# Altium PCB PAPAYA_PCB.PcbDoc
Units mil, origin at the board's own origin, x right, y up, seen from the top; angles counter-clockwise.
Board outline 2505.34 x 3520 mil, 2 copper layers (Top Layer, GND); 40 components, 32 nets, 125 pads, 16 vias.
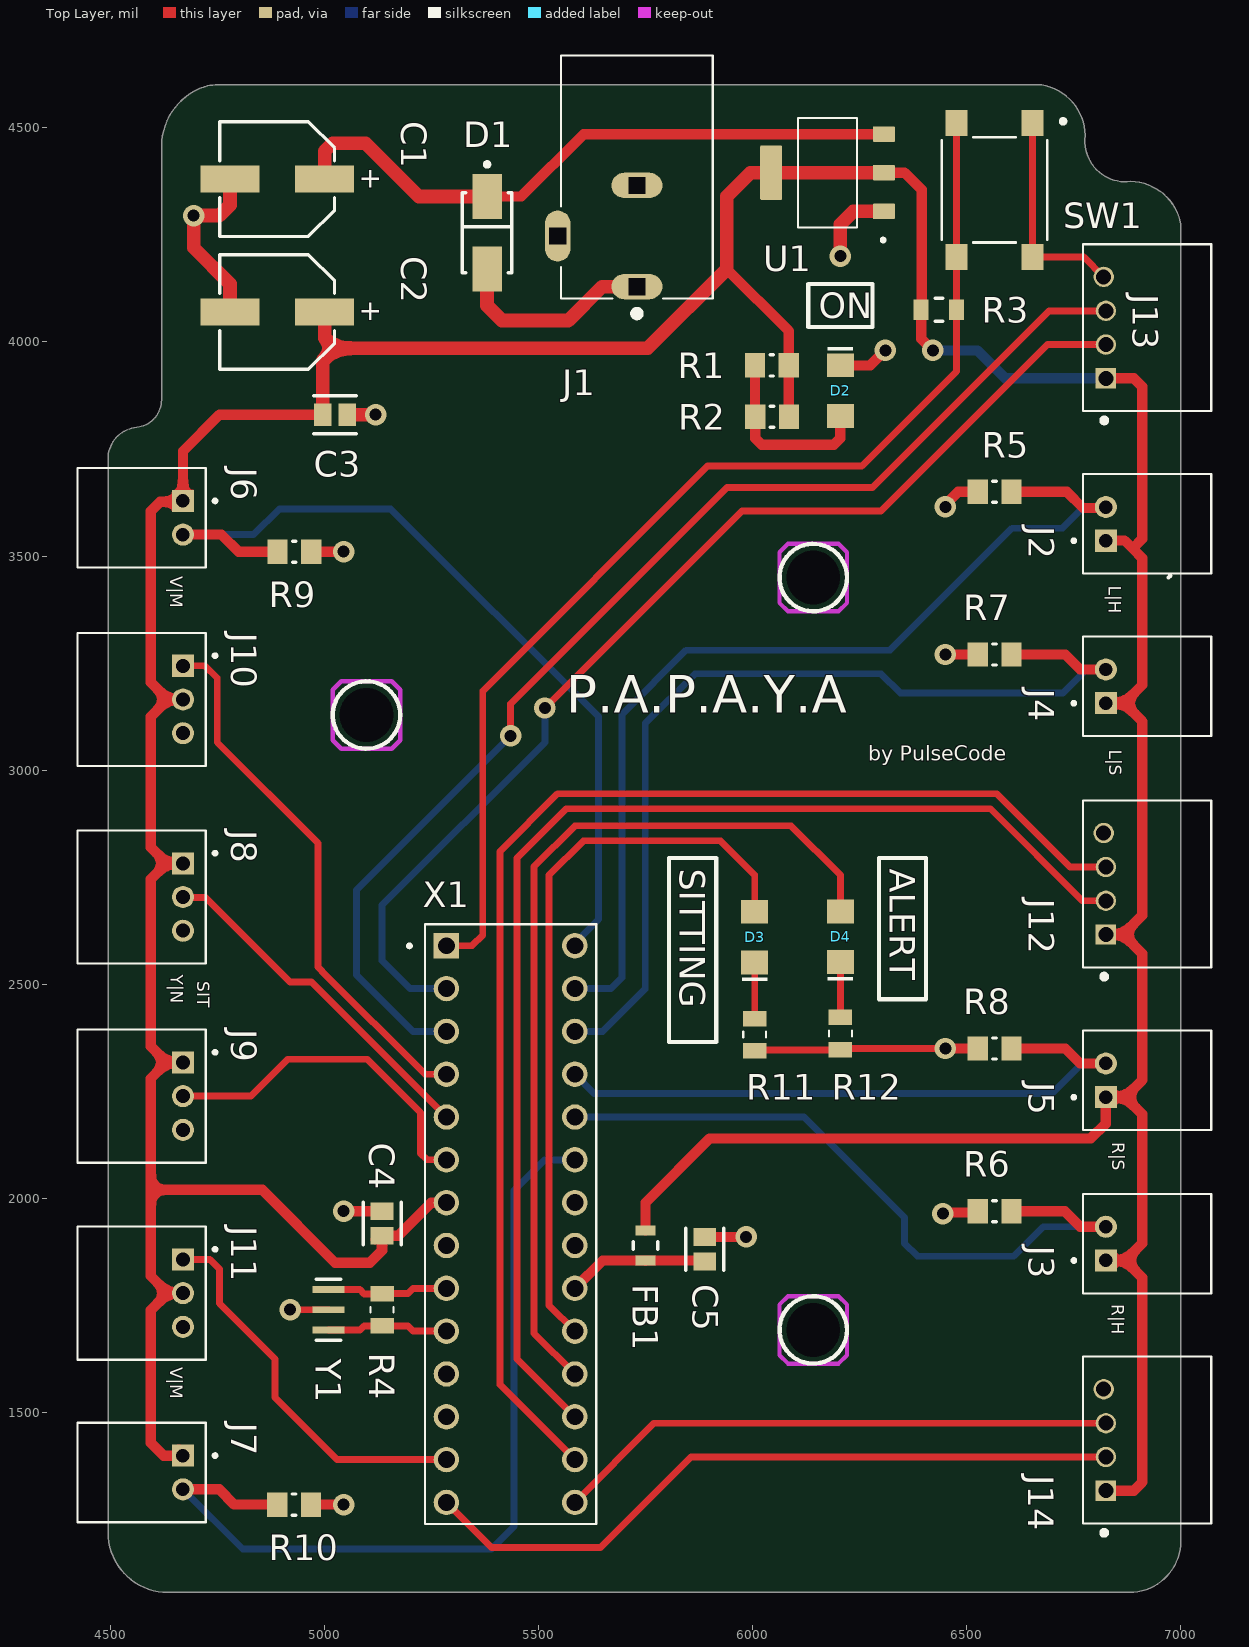
[diagram p0: Top Layer view]
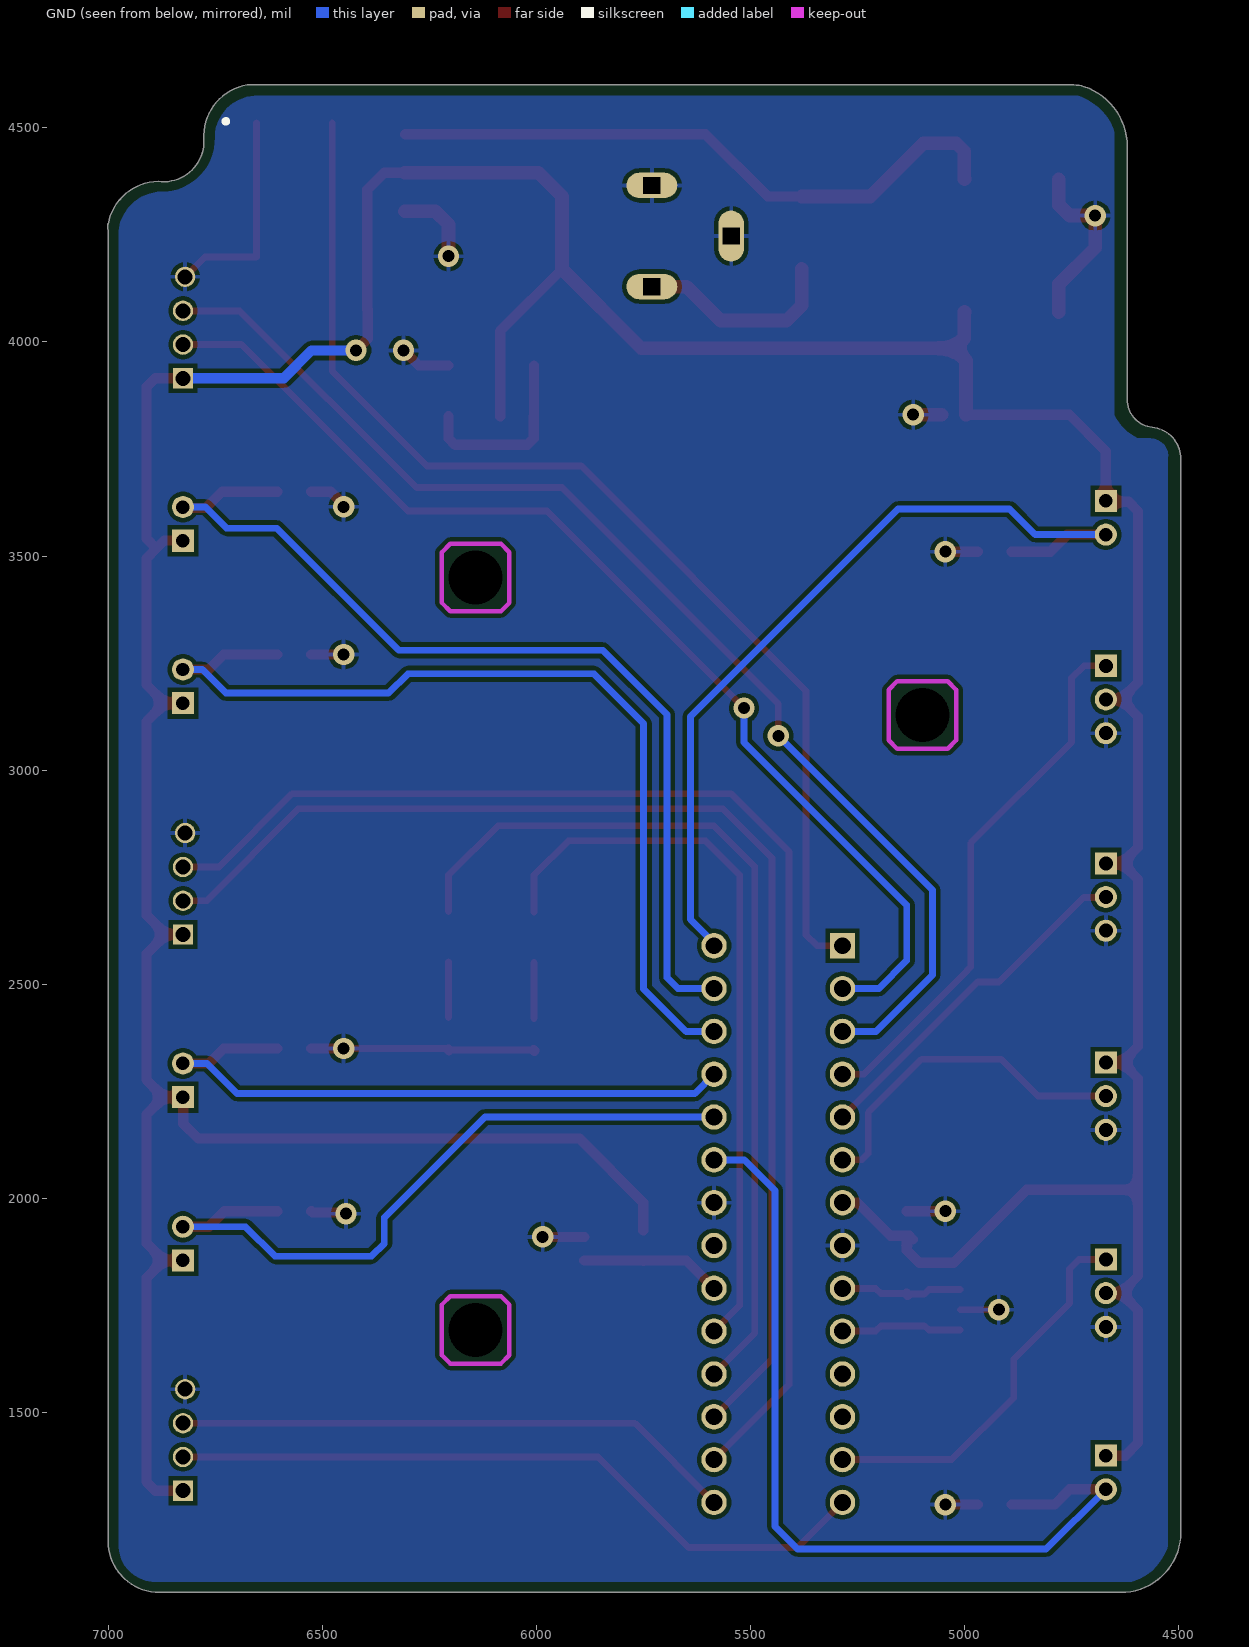
[diagram p1: GND view, seen from below]
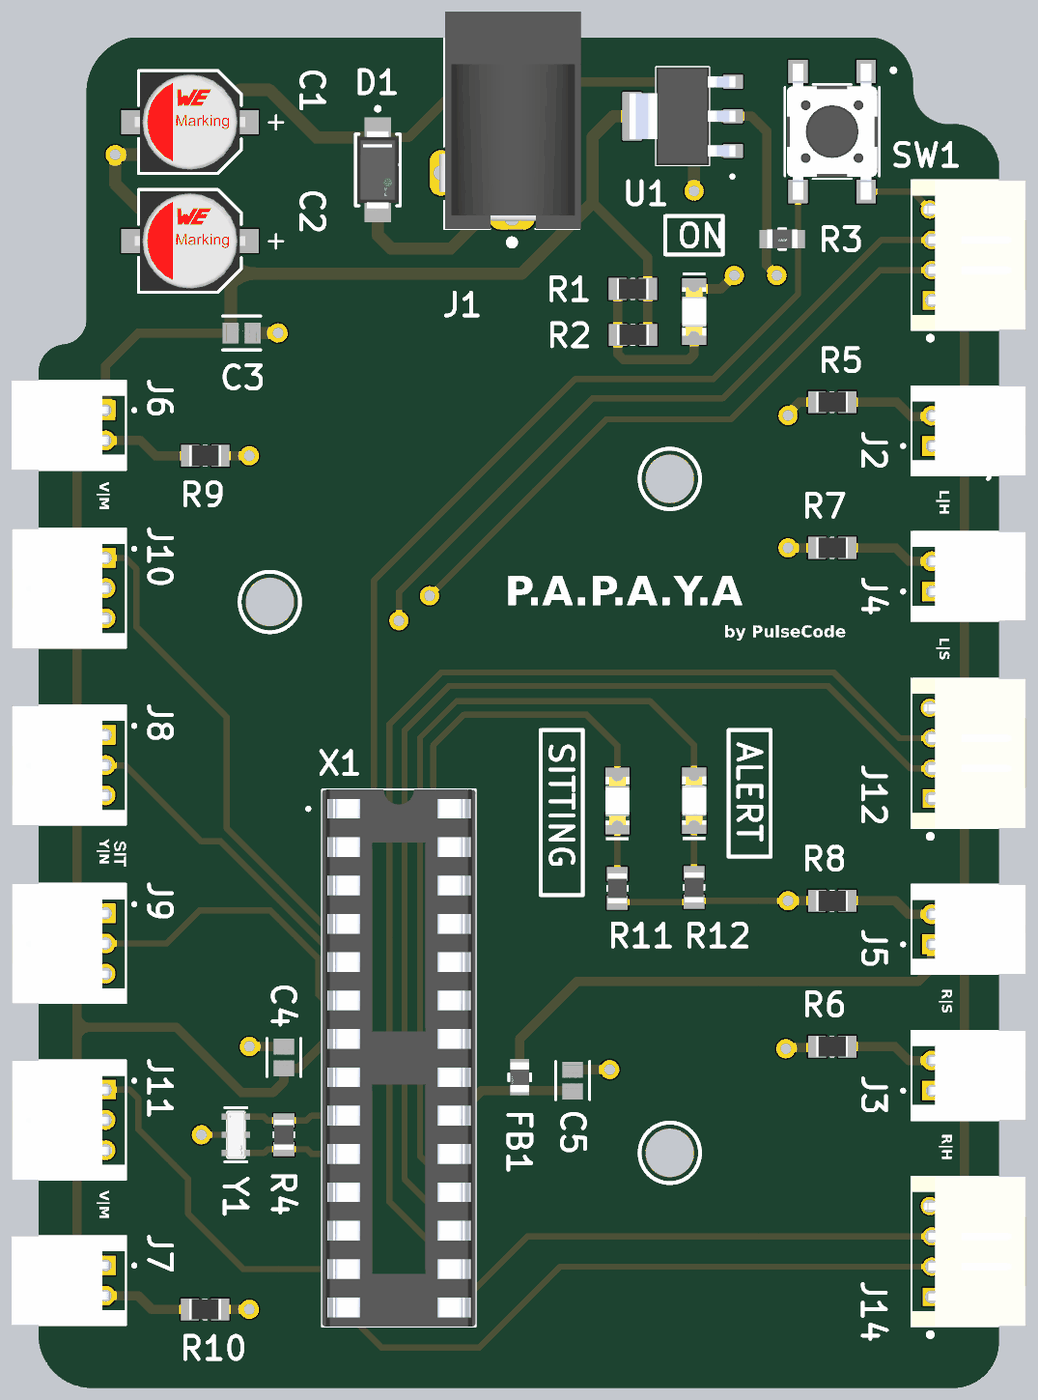
[diagram p2: 3D render of the assembled board from above, using the file's embedded part models]

## Layer stack, top to bottom
Top Solder: solder mask 0.4, Solder Resist, Dk 3.5
Top Layer: signal copper 1.4
Dielectric 1: dielectric 12.6, FR-4, Dk 4.8
GND: signal copper 1.4
Bottom Solder: solder mask 0.4, Solder Resist, Dk 3.5

## Board outline
4635,1080 6880,1080 ccw(c6880,1200) 7000,1200 7000,4225 cw(c10644.97,4225.01) 7000.34,4274.99 ccw(c7000.29,4275) 7000.28,4275.06 ccw(c7000.16,4274.71) 7000,4275.05 ccw(c6880.4,4253.19) 6883.11,4374.74 cw(c6870.42,4468.26) 6776.12,4472.34 ccw(c6655.64,4480.79) 6675.05,4600 4744.97,4600 ccw(c4744.93,4524.22) 4721.12,4596.16 ccw(c4767.25,4456.33) 4620,4456.31 4620,3915 4619.99,3865.15 cw(c4554.94,3865.13) 4561.73,3800.43 ccw(c4568.53,3727.21) 4495,3726.31 4495,1220 ccw(c4635,1220)

## Design rules (kind name [scope] priority, off if disabled: settings)
Clearance [All] p1: gap=10 ignorepadtopadclearanceinfootprint=FALSE except(0: Arc-Hole Track-Hole SMDPad-Hole THPad-Hole Via-Hole Fill-Hole Poly-Hole Region-Hole Text-Hole)
HoleSize [All] p1: absolutevalues=TRUE maxlimit=137.8 minlimit=1 maxpercent=80.000 minpercent=20.000
PolygonConnect [All] p1: connectstyle=Relief reliefconductorwidth=10 reliefentries=4 polygonreliefangle="90 Angle" airgapwidth=10
RoutingVias [All] p1: holewidth=28 width=50 viastyle="Through Hole" minholewidth=28 minwidth=50 maxholewidth=28 maxwidth=50
SilkToSilkClearance [All] p1: silktosilkclearance=5.91
SilkToSolderMaskClearance [IsPad] p1: minsilkscreentomaskgap=5.91 clearancetoexposedcopper=TRUE
SolderMaskExpansion [All] p1: expansion=4 istentingtop=FALSE
Width [All] p1: maxlimit=40 minlimit=10 preferedwidth=10 minimp=50.000000 maximp=50.000000 favimp=50.000000
27 further rules are at their usual default settings.

## Components (designator, comment, footprint, x,y, rotation, side; value= is the part's Value field where it differs from the comment)
C1 "865080443007" WCAP-ASLI_D6.3H5.5 4890,4380 r0 top
C2 "865080443007" WCAP-ASLI_D6.3H5.5 4890,4070 r0 top
C3 "CL21B104KBCNNNC" FP-CL21-IPC_C 5025,3830 r0 top
C4 "CL21B104KBCNNNC" FP-CL21-IPC_C 5135,1941.43 r90 top
C5 "CL21B104KBCNNNC" FP-CL21-IPC_C 5888.33,1881.43 r90 top
D1 "SS14" FP-403AE-MFG 5380,4255 r90 top
D2 "150120GS75000" WL-SMCW_1206_150120xx75000 6205,3885.94 r270 top
D3 "150120GS75000" WL-SMCW_1206_150120xx75000 6005,2610 r90 top
D4 "150120RS75000" WL-SMCW_1206_150120xx75000 6205,2610.94 r90 top
FB1 "BLM21PG300SN1D" FP-BLM21-0_2-t0_85-e0_5-d-MFG 5750.19,1890 r270 top
J1 "PJ-102AH" CUI_PJ-102AH 5730,4385 r90 top
J2 "S2B-PH-K-S(LF)(SN)" JST_S2B-PH-K-S(LF)(SN) 6825,3575 r90 top
J3 "S2B-PH-K-S(LF)(SN)" JST_S2B-PH-K-S(LF)(SN) 6825,1894.37 r90 top
J4 "S2B-PH-K-S(LF)(SN)" JST_S2B-PH-K-S(LF)(SN) 6825,3195.63 r90 top
J5 "S2B-PH-K-S(LF)(SN)" JST_S2B-PH-K-S(LF)(SN) 6825,2275.63 r90 top
J6 "S2B-PH-K-S(LF)(SN)" JST_S2B-PH-K-S(LF)(SN) 4670,3589.37 r270 top
J7 "S2B-PH-K-S(LF)(SN)" JST_S2B-PH-K-S(LF)(SN) 4670,1360 r270 top
J8 "S3B-PH-K-S(LF)(SN)" JST_S3B-PH-K-S(LF)(SN) 4670,2782.48 r270 top
J9 "S3B-PH-K-S(LF)(SN)" JST_S3B-PH-K-S(LF)(SN) 4670,2317.48 r270 top
J10 "S3B-PH-K-S(LF)(SN)" JST_S3B-PH-K-S(LF)(SN) 4670,3243.74 r270 top
J11 "S3B-PH-K-S(LF)(SN)" JST_S3B-PH-K-S(LF)(SN) 4670,1857.48 r270 top
J12 "S4B-PH-K-S(LF)(SN)" JST_S4B-PH-K-S(LF)(SN) 6825,2734.37 r90 top
J13 "S4B-PH-K-S(LF)(SN)" JST_S4B-PH-K-S(LF)(SN) 6825,4033.11 r90 top
J14 "S4B-PH-K-S(LF)(SN)" JST_S4B-PH-K-S(LF)(SN) 6825,1435.63 r90 top
R1 "RC0805FR-071KL" RESC2013X60X35ML10T20 6045,3945 r0 top
R2 "RC0805FR-071KL" RESC2013X60X35ML10T20 6045.63,3825 r0 top
R3 "RC0805JR-071KL" FP-RC0805-0_6-MFG 6435,4075 r180 top
R4 "RC0805FR-071ML" RESC2012X60N 5135,1740 r90 top value=1M
R5 "RC0805JR-0710KL" RESC2013X60X35ML10T20 6565,3650 r0 top
R6 "RC0805JR-0710KL" RESC2013X60X35ML10T20 6565,1970 r0 top
R7 "RC0805JR-0710KL" RESC2013X60X35ML10T20 6565,3270 r0 top
R8 "RC0805JR-0710KL" RESC2013X60X35ML10T20 6565,2350 r0 top
R9 "RC0805JR-0710KL" RESC2013X60X35ML10T20 4930,3510 r180 top
R10 "RC0805JR-0710KL" RESC2013X60X35ML10T20 4929.37,1285 r180 top
R11 "RC0805JR-07330RL" RESC2012X60N 6005,2382.4 r90 top value="330 Ohm"
R12 "RC0805JR-07330RL" RESC2012X60N 6205,2385 r90 top value="330 Ohm"
SW1 "PTS645SM43SMTR92LFS" SWITCH_43SMTR92LFS 6565,4355 r270 top
U1 "AMS1117-5.0_1" SOT229P700X180-4N 6175,4395 r90 top
X1 "ED281DT" OST_ED281DT 5435,1940 r0 top
Y1 "CSTNE16M0V530000R0" FP-CSTNE16M0V530000R0-MFG 5010,1740 r90 top

## Footprints (in the part's own frame and the unit in brackets; to place one, negate y for a bottom-side part, rotate by r counter-clockwise, add the part's x,y. Pads: shape width x height; smd on the part's side, far side on the other; paste and mask are expansions set on the pad)
CUI_PJ-102AH [mm]
  oval 1.508x3.016 hole 1 square: 1(-6.5,0) 2(-0.5,0)
  oval 3.016x1.508 hole 1 square: 3(-3.5,4.7)
  silkscreen extent -8.3,-4.5 7.2,4.5, body extent -7.2,-4.57 7.2,4.83, height 11.26
FP-403AE-MFG [mm]
  rect 2.65x1.75 smd paste+0 mask+0: 1(-2.15,0) 2(2.15,0)
  silkscreen extent -2.37,-1.48 4.17,1.48, body extent -3.57,-1.58 3.57,1.58, height 0.25
FP-BLM21-0_2-t0_85-e0_5-d-MFG [mm]
  rect 0.6x1.2 smd paste-1000 mask-1000: 1(-0.9,0) 2(0.9,0)
  silkscreen extent -0.23,-0.72 0.23,0.72, body extent -1.3,-0.82 1.3,0.82, height 0.25
FP-CL21-IPC_C [mil]
  rect 41.52x53.39 smd paste+0 mask+0: 1(-28.57,0) 2(28.57,0)
  silkscreen extent -49,-44 49,44, body extent -53,-32 53,32, height 10
FP-CSTNE16M0V530000R0-MFG [mm]
  rect 0.4x1.9 smd paste+0 mask+0: 1(1.2,0) 2(0,0) 3(-1.2,0)
  silkscreen extent -1.8,-0.72 1.8,0.72, body extent -1.78,-1.05 1.78,1.05, height 0.25
FP-RC0805-0_6-MFG [mm]
  rect 0.9x1.2 smd paste+0 mask+0: 1(-1.05,0) 2(1.05,0)
  silkscreen extent -0.23,-0.67 0.23,0.67, body extent -1.6,-0.77 1.6,0.77, height 0.25
JST_S2B-PH-K-S(LF)(SN) [mm]
  rect 1.308x1.308 / inner round 1.308 / far side rect 1.308x1.308 hole 0.8: 1(-1,0)
  round 1.308 hole 0.8: 2(1,0)
  silkscreen extent -2.95,-6.25 2.95,2, body extent -2.95,-6.22 2.95,1.38, height 4.8
JST_S3B-PH-K-S(LF)(SN) [mm]
  rect 1.308x1.308 hole 0.83: 1(0,0)
  round 1.308 hole 0.83: 2(2,0) 3(4,0)
  silkscreen extent -1.95,-6.25 5.95,2, body extent -1.92,-6.2 5.98,1.4, height 4.8
JST_S4B-PH-K-S(LF)(SN) [mm]
  rect 1.208x1.208 hole 0.89: 1(-3,0)
  round 1.208 hole 0.89: 2(-1,0) 3(1,0) 4(3.016,0.127)
  silkscreen extent -5.64,-6.25 4.95,1.35, body extent -4.95,-6.22 4.95,1.38, height 4.8
OST_ED281DT [mm]
  rect 1.508x1.508 / inner round 1.508 / far side rect 1.508x1.508 hole 1: 1(-3.81,16.51)
  round 1.508 hole 1: 2(-3.81,13.97) 3(-3.81,11.43) 4(-3.81,8.89) 5(-3.81,6.35) 6(-3.81,3.81) 7(-3.81,1.27) 8(-3.81,-1.27) 9(-3.81,-3.81) 10(-3.81,-6.35) 11(-3.81,-8.89) 12(-3.81,-11.43) 13(-3.81,-13.97) 14(-3.81,-16.51) 15(3.81,-16.51) 16(3.81,-13.97) 17(3.81,-11.43) 18(3.81,-8.89) 19(3.81,-6.35) 20(3.81,-3.81) 21(3.81,-1.27) 22(3.81,1.27) 23(3.81,3.81) 24(3.81,6.35) 25(3.81,8.89) 26(3.81,11.43) 27(3.81,13.97) 28(3.81,16.51)
  silkscreen extent -6.1,-17.78 5.08,17.78, body extent -5.08,-17.78 5.08,17.78, height 5.27
RESC2012X60N [mm]
  rect 0.92x1.38 smd: 1(-0.955,0) 2(0.955,0)
  silkscreen extent -0.17,-0.68 0.17,0.68, body extent -1,-0.63 1,0.63, height 0.6
RESC2013X60X35ML10T20 [mm] "Chip Resistor, 2-Leads, Body 2.1x1.35mm, IPC Low Density"
  rect 1.2x1.45 smd: 1(-1,0) 2(1,0)
  silkscreen extent -0.1,-0.63 0.1,0.63, body extent -1.05,-0.68 1.05,0.67, height 0.6
SOT229P700X180-4N [mm]
  rrect15% 0.93x1.31 smd: 1(-2.29,-3.345) 2(0,-3.345) 3(2.29,-3.345)
  rrect15% 3.24x1.31 smd: 4(0,3.345)
  silkscreen extent -4.09,-3.4 3.25,1.75, body extent -3.25,-3.5 3.25,3.5, height 1.8
SWITCH_43SMTR92LFS [mil]
  rect 61x51 smd: 1(-156.5,88.58) 2(156.5,88.58) 3(-156.5,-88.58) 4(156.5,-88.58)
  silkscreen extent -165,-123 123,165, body extent -177,-118 177,118, height 169
WCAP-ASLI_D6.3H5.5 [mm] "Aluminium Electrolytic V-Chip SMT Capacitors, 6.3x5.5mm"
  rect 3.5x1.6 smd: 1(2.8,0) 2(-2.8,0)
  silkscreen extent -3.4,-3.4 3.4,3.4, body extent -3.65,-3.3 3.65,3.3, height 5.5
WL-SMCW_1206_150120xx75000 [mm] "SMD Mono-color Chip LED, body 3.2x1.6mm"
  rect 1.4x1.6 smd: 1(-1.5,0) 2(1.5,0)
  silkscreen extent -2.6,-0.75 -2.4,0.75, body extent -1.6,-0.8 1.6,0.8, height 0.68

## Part data
C1 C2: library part CMP-03913-53914590-1, "865080443007 WCAP-ASLI Aluminum Electrolytic Capacitors", Capacitance=47µF, Case/Package=Radial, ESR (Equivalent Series Resistance)=397.678mΩ, Insulation Resistance=2.12766MΩ, Leakage Current=11.75µA, Max Operating Temperature=105°C, Min Operating Temperature=-55°C, Ripple Current=220mA, Tolerance=20%, Voltage Rating=25V, Diameter=6.3mm, Height=5.5mm, Height - Seated (Max)=5.5118mm, Impedance=560mΩ, Length=5.5mm, Life (Hours)=2000hours, Mount="Surface Mount", NexarPartId=53914590, Packaging="Cut Tape (CT)", Polarity=Polar, REACH SVHC=Unknown, Ripple Current (AC)=220mA, RoHS=Compliant, Voltage Rating (DC)=25V, Width=6.6mm
C3 C4 C5: library part CMP-2000-05017-2, "CL21 Series 0805 100nF 50V ±10% Tolerance X7R Multilayer Ceramic Chip Capacitor", Capacitance=100nF, Case Code (Imperial)=0805, Case Code (Metric)=2012, Dielectric=X7R, Max Operating Temperature=125°C, Min Operating Temperature=-55°C, Tolerance=10%, Voltage=50V, Case/Package=0805, Contact Plating=Tin, Depth=1.25mm, Height=0.85mm, Lead Free="Lead Free", Length=2mm, Material=Ceramic, Mount="Surface Mount", Packaging="Tape and Reel", Radiation Hardening=No, Thickness=0.037inch, Voltage Rating=50V, Voltage Rating (DC)=50V, Width=0.049inch
D1: library part CMP-2000-04943-2, "DIODE SCHOTTKY 40V 1A SMA", Forward Current=1A, Manufacturer="ON Semiconductor", Max Junction Temp=+125°C, Max Repetitive Reverse Voltage=40V, Max Surge Forward Current=40A, Package=403AE, Peak Reverse Current=0.2mA, Temperature="-65°C to +125°C", Temperature Range Low=-65°C, Automotive=No, Category=Diode, ComponentLink2Description=Datasheet, ComponentLink2URL=https://www.onsemi.com/pub/Collateral/SS19-D.PDF, Device Class L1="Discrete Semiconductors", Device Class L2=Diodes, Device Class L3="Schottky Diodes", Digikey Description="DIODE SCHOTTKY 40V 1A SMA", Height=2.5mm, Lead Free=Yes, Manufacturer Part Number=SS14, Mouser Description="Schottky Diodes & Rectifiers SMA 40V 1.0A", Octopart=https://octopart.com/ss14-on+semiconductor-29205033, RoHS=TRUE, Standoff Height=0.05mm, Temperature Range High=+125°C
D2 D3: library part CMP-1426-00007-3, "WURTH ELEKTRONIK - 150080GS75000 - LED, Green, SMD, 0805, 30 mA, 3.2 V, 520 nm", Case Code (Imperial)=0805, Case Code (Metric)=2012, Color=Green, Forward Current=100mA, Forward Voltage=3.2V, Max Junction Temperature (Tj)=95°C, Max Operating Temperature=85°C, Max Reverse Voltage (DC)=5V, Min Operating Temperature=-40°C, Power Dissipation=105mW, Test Current=20mA, Case/Package=0805, Dominant Wavelength=525nm, Height=700µm, Length=2mm, Lens Style="Clear, Rectangular", Luminous Intensity=450mcd, Mount="Surface Mount", Packaging="Tape and Reel", Peak Wavelength=515nm, REACH SVHC=Unknown, Reverse Voltage=5V, RoHS=Compliant, Viewing Angle=140°, Wavelength=525nm, Width=1.25mm
D4: library part CMP-1426-00011-3, "LED Uni-Color Red 630nm 2-Pin Chip 0805(2012Metric) T/R", Case Code (Imperial)=0805, Case Code (Metric)=2012, Color=Red, Forward Current=100mA, Forward Voltage=2V, Max Junction Temperature (Tj)=95°C, Max Operating Temperature=85°C, Max Reverse Voltage (DC)=5V, Min Operating Temperature=-40°C, Power Dissipation=72mW, Test Current=20mA, Case/Package=0805, Dominant Wavelength=625nm, Height=700µm, Length=2mm, Lens Style="Clear, Rectangular", Luminous Intensity=150mcd, Mount="Surface Mount", Packaging="Tape and Reel", Peak Wavelength=630nm, REACH SVHC=Unknown, RoHS=Compliant, Viewing Angle=140°, Wavelength=625nm, Width=1.25mm
FB1: library part CMP-0686-00620-3, "Chip Ferrite Bead, 0805, 30Ω @ 100MHz, 0.014Ω, , 4A", Case Code (Imperial)=0805, Case Code (Metric)=2012, Current Rating=4A, DC Current=3A, DC Resistance (DCR)=14mR, Frequency=100MHz, Max Operating Temperature=125°C, Min Operating Temperature=-55°C, Package Quantity=1, Resistance=15mR, Tolerance=25%, Case/Package=0805, Core Material=Ferrite, DC Resistance-Max=14mR, Depth=1.25mm, Height=0.85mm, Impedance=30R, Lead Free="Lead Free", Length=2mm, Material=Steel, Max Current Rating=4A, Max DC Current=3A, Military Standard=Not, Number of Circuits=1, Number of Lines=1, Number of Pins=2, Packaging="Tape and Reel", Radiation Hardening=No, REACH SVHC="No SVHC", RoHS Compliant=Yes, Series=BLM21P, Shielding=Unshielded, Termination=SMD/SMT, Test Frequency=100MHz, Width=1.25mm
J1: "2.0 x 6.5 mm, 5.0 A, Horizontal, Through Hole, Tapered Pins, Dc Power Jack Connector", Manufacturer="Same Sky", Package=None, Supplier Part Number=CP-102AH-ND, Check_prices=https://www.snapeda.com/parts/PJ-102AH/Same+Sky/view-part/?ref=eda, ComponentLink1Description=https://datasheet.octopart.com/PJ-102AH-Same-Sky-datasheet-182049965.pdf?src-supplier=Future+Electronics, ComponentLink1URL=https://datasheet.octopart.com/PJ-102AH-Same-Sky-datasheet-182049965.pdf?src-supplier=Future+Electronics, ComponentLink2Description=http://www.cui.com/Product/Resource/FuturePDF/PJ-102AH.pdf?src-supplier=Future+Electronics, ComponentLink2URL=http://www.cui.com/Product/Resource/FuturePDF/PJ-102AH.pdf?src-supplier=Future+Electronics, ComponentLink3Description=https://datasheet.octopart.com/PJ-102AH-Same-Sky-datasheet-182881008.pdf?src-supplier=Electro+Sonic, ComponentLink3URL=https://datasheet.octopart.com/PJ-102AH-Same-Sky-datasheet-182881008.pdf?src-supplier=Electro+Sonic, ComponentLink4Description=https://datasheet.octopart.com/PJ-102AH-CUI-Devices-datasheet-175925642.pdf?src-supplier=Master+Electronics, ComponentLink4URL=https://datasheet.octopart.com/PJ-102AH-CUI-Devices-datasheet-175925642.pdf?src-supplier=Master+Electronics, Manufacturer Part Number=PJ-102AH, MF="Same Sky", MP=PJ-102AH, Pricing="1=0.76, 10=0.646, 25=0.6056, 50=0.5766, 200=0.5227, 400=0.4977, 600=0.48367, 1000=0.46653, 2600=0.43611 (USD)", RoHS=No, SnapEDA_Link=https://www.snapeda.com/parts/PJ-102AH/Same+Sky/view-part/?ref=snap, Stock=37690, Supplier=Digikey
J2 J3 J4 J5 J6 J7: "Connector Header Through Hole, Right Angle 2 position", Package=None, Availability="In Stock", Check_prices=https://www.snapeda.com/parts/S2B-PH-K-S(LF)(SN)/JST+Sales+America+Inc./view-part/?ref=eda, MF="JST Sales America Inc.", MP=S2B-PH-K-S(LF)(SN), Price=None, Purchase-URL=https://pricing.snapeda.com/search/part/S2B-PH-K-S(LF)(SN)/?ref=eda, SnapEDA_Link=https://www.snapeda.com/parts/S2B-PH-K-S(LF)(SN)/JST+Sales+America+Inc./view-part/?ref=snap
J8 J9 J10 J11: "Connector Header Through Hole, Right Angle 3 position 0.079\" (2.00mm)", Package=None, Availability=Unavailable, MP=S3B-PH-K-S(LF)(SN), Price=None
J12 J13 J14: "Connector Header Through Hole, Right Angle 4 position 0.079 _2.00mm_", Package=None, Availability=Unavailable, MF="JST Sales", MP=S4B-PH-K-S_LF__SN_, Price=None, SnapEDA_Link=https://www.snapeda.com/parts/S4B-PH-K-S%28LF%29%28SN%29/JST%20Sales%20America%20Inc./view-part/591324/?ref=snap
R1 R2: library part CMP-2100-03671-1, "Chip Resistor, 1 KOhm, +/- 1%, 125 mW, -55 to 155 degC, 0805 (2012 Metric), RoHS, Tape and Reel", Case Code (Imperial)=0805, Case Code (Metric)=2012, Manufacturer=Yageo, Max Operating Temperature=155degC, Max Power Dissipation=125mW, Min Operating Temperature=-55degC, Package Description="2-Pin Surface Mounted Device, Body 2 x 1.25 mm", Package Quantity=1, Resistance=1KOhm, Temperature Coefficient=100ppm/degreesC, Tolerance=1%, Voltage Rating=150V, Case/Package=0805, Composition=ThickFilm, Datasheet URL=http://www.yageo.com/NewPortal/yageodocoutput?fileName=/pdf/R-Chip/PYu-RC_Group_51_RoHS_L_5.pdf, Datasheet Version="Rev. 5, 10/2016", Depth=1.25mm, Height=0.024inch, Lead Free=LeadFree, Length=0.079inch, Manufacturer URL=http://www.yageo.com/, Military Standard=Not, Number of Pins=2, Number of Terminations=2, Package Reference=0805, Packaging=TapeandReel, Power Rating=125mW, REACH SVHC=Unknown, RoHSCompliant=true, Termination=SMD/SMT, Voltage Rating (DC)=150V, Width=0.049inch
R3: library part CMP-03412-037820-1, "RES SMD 1K OHM 5% 1/8W 0805", Case Code (Imperial)=0805, Case Code (Metric)=2012, Max Operating Temperature=155°C, Max Power Dissipation=125mW, Min Operating Temperature=-55°C, Resistance=1kR, Resistance Tolerance=5%, Resistor Type="Thick Film", Temperature Coefficient=100ppm/°C, Voltage Rating=150V, Case/Package=0805, Construction=Rectangular, Contact Plating=Tin, Depth=1.25mm, Features="Moisture Resistant", Lead Free="Lead Free", Length=2mm, Military Standard=Not, Number of Terminations=2, Packaging="Tape and Reel", Power Rating=125mW, Radiation Hardening=No, RoHS Compliant=Yes, Series=RC, Size Code=0805, Termination=SMD/SMT, Tolerance=5%
R4: "1 MOhms Â±1% 0.125W, 1/8W Chip Resistor 0805 (2012 Metric) Moisture Resistant Thick Film", Package="2012 Yageo", Check_prices=https://www.snapeda.com/parts/RC0805FR-071ML/Yageo/view-part/?ref=eda, MF=Yageo, MP=RC0805FR-071ML, SnapEDA_Link=https://www.snapeda.com/parts/RC0805FR-071ML/Yageo/view-part/?ref=snap
R5 R6 R7 R8 R9 R10: library part CMP-2000-05025-1, "Chip Resistor, 10 KOhm, +/- 5%, 0.125 W, -55 to 155 degC, 0805 (2012 Metric), RoHS, Tape and Reel", Manufacturer=Yageo, Package Description="2-Pin Surface Mounted Device, Body 2 x 1.25 mm", Package Reference=805, Power Rating=250mW, Resistance=10K, Resistance Tolerance=±5%, Resistor Case Style=0805[2012Metric], Resistor Element Type=ThickFilm, Temperature Coefficient=±100ppm/degC, Voltage Rating=150V, Automotive Qualification Standard=-, Datasheet URL=http://www.yageo.ru/pdf/RC0805.pdf, Datasheet Version="REV. 2, 09/2004", Manufacturer URL=http://www.yageo.com/, MSL=MSL1-Unlimited, Packaging=CutTape, Product Range=RCSeries, SVHC=ToBeAdvised
R11 R12: "Fixed Resistor, Metal Glaze/thick Film, 0.125W, 330ohm, 150V, 5% +/-Tol, 100ppm/Cel, Surface Mount, 0805", Case/Package=0805, Manufacturer=Yageo, Max Operating Temperature=155°C, Min Operating Temperature=-55°C, Package="2012 Rohm Semiconductor", Package Height=0.5mm, Package Length=2mm, Package Shape=Rectangular, Package Width=1.25mm, Power=125mW, Rated Temperature=70°C, Resistor Type="FIXED RESISTOR", Supplier Part Number=7136500, Temperature Coefficient (ppm/Cel)=100, Tolerance=5%, Working Voltage=150V, Additional Feature="LASER TRIMMABLE", Category="Chip SMD Resistors", Check_prices=https://www.snapeda.com/parts/RC0805JR-07330RL/Yageo/view-part/615249/?ref=eda, ComponentLink1Description=https://datasheet.ciiva.com:443/pdfs/VipMasterIC/IC/YAGO/YAGO-S-A0008145938/YAGO-S-A0008145938-1.pdf?src-supplier=IHS+Markit, ComponentLink1URL=https://datasheet.ciiva.com:443/pdfs/VipMasterIC/IC/YAGO/YAGO-S-A0008145938/YAGO-S-A0008145938-1.pdf?src-supplier=IHS+Markit, ComponentLink2Description=https://datasheet.ciiva.com/17008/rc0805-17008395.pdf?src-supplier=Future+Electronics, ComponentLink2URL=https://datasheet.ciiva.com/17008/rc0805-17008395.pdf?src-supplier=Future+Electronics, ComponentLink3Description=https://datasheet.ciiva.com/12555/rc0805-257173-12555078.pdf?src-supplier=Mouser, ComponentLink3URL=https://datasheet.ciiva.com/12555/rc0805-257173-12555078.pdf?src-supplier=Mouser, ComponentLink4Description=https://datasheet.ciiva.com/46395/444164-46395119.pdf?src-supplier=Element14, ComponentLink4URL=https://datasheet.ciiva.com/46395/444164-46395119.pdf?src-supplier=Element14, ComponentLink5Description=https://datasheet.ciiva.com/7941/442941-7941941.pdf?src-supplier=Element14, ComponentLink5URL=https://datasheet.ciiva.com/7941/442941-7941941.pdf?src-supplier=Element14, ComponentLink6Description=https://datasheet.ciiva.com/7941/442941-7941942.pdf?src-supplier=Element14, ComponentLink6URL=https://datasheet.ciiva.com/7941/442941-7941942.pdf?src-supplier=Element14, Construction=Chip, Digi-Key_Part_Number=311-330ARCT-ND, JESD-609 Code=e3, Manufacturer Part Number=RC0805JR-07330RL, MF=Yageo, Mounting Technology="Surface Mount", MP=RC0805JR-07330RL, Packaging="Tape and Reel", Pins=2, Pricing="5000=0.0014, 25000=0.0014, 100000=0.0013, 250000=0.0013, 625000=0.0012 (USD)", Purchase-URL=https://pricing.snapeda.com/search/part/RC0805JR-07330RL/?ref=eda, Reach SVHC Compliant=Yes, RoHS=Yes, RoHS Compliant=Yes, SnapEDA_Link=https://www.snapeda.com/parts/RC0805JR-07330RL/Yageo/view-part/615249/?ref=snap, Stock=65000, Supplier="Future Electronics", Technology="METAL GLAZE/THICK FILM", Terminal Finish=Nickel, Termination=Wraparound
SW1: library part PTS645SM43SMTR92LFS_1, "SWITCH TACTILE SPST-NO 0.05A 12V", Case/Package=SMD/SMT, Color=Black, Contact Resistance=100mR, Current Rating=50mA, Max Operating Temperature=60°C, Max Voltage Rating (DC)=12V, Min Operating Temperature=-20°C, Operating Force=160gf, Package Quantity=1, Actuator Length=0.85mm, Actuator Material=Nylon, Actuator Type=Standard, Contact Material=Silver, Contact Plating=Silver, Depth=9mm, Illumination Type=Non-Illuminated, Lead Free="Lead Free", Length=6mm, Max Current Rating=50mA, Mechanical Life=100000Cycles, Mount="Surface Mount", Orientation=Straight, Packaging="Tape and Reel", REACH SVHC="No SVHC", Switch Function=Off-Mom, Termination="Gull Wing", Throw Configuration=SPST, Voltage Rating (DC)=12V
U1: "1A LOW DROPOUT VOLTAGE REGULATOR", Package="SOT-223 Seeed Technology", Availability="Not in stock", Check_prices=https://www.snapeda.com/parts/AMS1117-5.0/ams/view-part/?ref=eda, MF=ams, MP=AMS1117-5.0, Price=None, SnapEDA_Link=https://www.snapeda.com/parts/AMS1117-5.0/ams/view-part/?ref=snap
X1: "CONN IC DIP SOCKET 28POS TIN", Package=None, Availability=Unavailable, MP=altium_native_batch, Price=None
Y1: library part CMP-06054-000001-1, "CERAMIC RES 16.0000MHZ 15PF SMD", Frequency=16MHz, Load Capacitance=15pF, Manufacturer=Murata, Package=0, Temperature="-40°C to +85°C", Temperature Range High=+85°C, Temperature Range Low=-40°C, Tolerance=0.5%, Automotive=No, Category=Crys, ComponentLink2Description=Datasheet, ComponentLink2URL=https://www.murata.com/en-sg/products/productdata/8801162231838/SPEC-CSTNE16M0V530000R0.pdf?1545967809000, Device Class L1="Passive Components", Device Class L2="Crystals / Oscillators", Device Class L3=Crystals, Digikey Description="CERAMIC RES 16.0000MHZ 15PF SMD", Esr=40Ω, Height=1mm, Lead Free=Yes, Manufacturer Part Number=CSTNE16M0V530000R0, Mouser Description="Ceramic Resonator 16MHz ±0.5% (Tol) ±0.3% (Stability) 15pF 40Ohm 3-Pin CSMD T/R", Octopart=https://octopart.com/cstne16m0v530000r0-murata-91406924, RoHS=TRUE, Series=CSTNE_V, Stability=0.3%

## Free pads (board coordinates)
  round 60 hole 125.98: 10(5098.43,3128.94) 11(6141.73,3449.8) 12(6141.73,1692.91)

## Via types
v1: diameter 50, hole 28, Top Layer to GND, 16 vias

## Nets (pads, with @x,y where several pads share a name; then routed paths per layer and width w, separated by ;. In a path a pad name is that pad's centre, name@x,y a point inside that pad or via, vN(x,y) a via of type N, cw(c..) or ccw(c..) an arc to the next point about the centre after c; other vN are vias at no path point)
A0: J7.2 R10.2 X1.23 | length 2043.6
  Top Layer w24: J7.2 4754.37,1320.63 4790,1285 R10.2
  GND w16: J7.2 4809.53,1181.1 5390,1181.1 5442.91,1234.02 5442.91,2018.55 5514.37,2090 X1.23
A1: J3.2 R6.2 X1.24 | length 1673.9
  Top Layer w24: R6.2 6728.74,1970 6765,1933.74 J3.2
  GND w16: X1.24@5594.57,2190 6120,2190 6355,1955 6355,1895 6385,1865 6610,1865 6678.74,1933.74 J3.2
  GND w24: X1.24 X1.24@5594.57,2190
A2: J5.2 R8.2 X1.25 | length 1530.6
  Top Layer w24: R8.2 6730,2350 6765,2315 J5.2
  GND w16: X1.25 5630,2245 6698.74,2245 6768.74,2315 J5.2
  GND w24: X1.25 X1.25@5592.86,2290
A3: J4.2 R7.2 X1.26 | length 2225.6
  Top Layer w24: R7.2 6730,3270 6765,3235 J4.2
  GND w16: X1.26 5650,2390 5749.28,2489.28 5749.28,3109.28 5865,3225 6300,3225 6345,3180 6725,3180 6780,3235 J4.2
A4: J2.2 R5.2 X1.27 | length 2303
  Top Layer w24: R5.2 6733.86,3650 6771.65,3612.2 6822.83,3612.2 J2.2
  GND w16: X1.27 5669.68,2490 5695,2515.32 5695,3130 5845,3280 6321.25,3280 6606.25,3565 6723.35,3565 6772.72,3614.37 J2.2
A5: J6.2 R9.2 X1.28 | length 1990.7
  Top Layer w24: J6.2 4760,3550 4800,3510 R9.2
  GND w16: J6.2 4835,3550 4895,3610 5155,3610 5640,3125 5640,2651.74 X1.28@5585,2596.74
  GND w24: X1.28 X1.28@5585,2596.74
AREF: X1.21
AVCC: C5.1 FB1.2 X1.20 | length 330.5
  Top Layer w24: X1.20 5650,1855 5695,1855 5695.24,1854.76 5749.81,1854.76 5750,1854.57 5750.19,1854.76 C5.1@5888.33,1854.76
D0: J13.2 X1.2 | length 2585.9
  Top Layer w16: v1(5515,3145) 5975,3605 6300,3605 6688.74,3993.74 J13.2
  GND w16: X1.2 5200,2490 5135,2555 5135,2685 5515,3065 v1(5515,3145)
D1: J13.3 X1.3 | length 2817
  Top Layer w16: v1(5435,3080) 5435,3155 5940,3660 6280,3660 6692.48,4072.48 J13.3
  GND w16: X1.3 5206.76,2390 5075,2521.76 5075,2720 v1(5435,3080)
D2: J10.1 X1.4 | length 1267.8
  Top Layer w16: J10.1 4721.26,3243.74 4750,3215 4750,3065 4985.63,2829.37 4985.63,2540 4995,2530.63 4995,2530 5235,2290 X1.4
D3: J8.2 X1.5 | length 827.8
  Top Layer w16: J8.2 4671.05,2702.69 4722.31,2702.69 4920,2505 4970,2505 X1.5
D4: J9.2 X1.6 | length 803.7
  Top Layer w16: J9.2 4828.74,2238.74 4915,2325 5100,2325 5225,2200 5225,2105 5239.64,2090.36 5284.64,2090.36 X1.6
D5: X1.11
D6: X1.12
D7: J11.1 X1.13 | length 908.2
  Top Layer w16: J11.1 4732.52,1857.48 4755,1835 4755,1755 4885,1625 4885,1535 5030,1390 X1.13
D8: J14.2 X1.14 | length 1671
  Top Layer w16: X1.14 5390,1185 5645,1185 5856.26,1396.26 J14.2
D9: J14.3 X1.15 | length 1316.6
  Top Layer w16: X1.15 5770,1475 J14.3
D10: J12.3 X1.16 | length 3034.3
  Top Layer w16: X1.16 5410,1565 5410,2810 5545,2945 6570,2945 6741.26,2773.74 J12.3
D11: J12.2 X1.17 | length 2872.6
  Top Layer w16: X1.17 5450,1625 5450,2795 5565,2910 6555,2910 6770,2695 J12.2
D12: D4.2 X1.18 | length 2111.3
  Top Layer w16: X1.18 5490,1685 5490,2775 5585,2870 6090,2870 6205,2755 D4.2
D13: D3.2 X1.19 | length 1722.1
  Top Layer w16: X1.19 5525,1750 5525,2755 5605,2835 5925,2835 6005,2755 D3.2
GND: C1.2 C2.2 C3.2 C4.2 C5.2 D2.1 J1.2 J1.3 J8.3 J9.3 J10.3 J11.3 J12.4 J13.4 J14.4 R5.1 R6.1 R7.1 R8.1 R9.1 R10.1 R11.1 R12.1 SW1.1 SW1.2 U1.1 X1.8 X1.22 Y1.2 | length 2492.7
  Top Layer w16: v1(4920,1740) Y1.2 ; R11.1@6006.3,2346.1 R12.1@6203.7,2346.1 ; R12.1 6207.6,2350 v1(6450,2350) ; SW1.1 SW1.2 6773.35,4198.5 J13.4
  Top Layer w24: R10.1 v1(5045,1285) ; R9.1 v1(5045,3510) ; v1(5045,1970) C4.2 ; C5.2 v1(5985,1910) ; R11.1 R11.1@6006.3,2346.1 ; R12.1@6203.7,2346.1 R12.1 ; D2.1 6275,3945 v1(6310,3980) ; v1(6444.27,1964.27) 6447.13,1967.13 6522.76,1967.13 R6.1 ; v1(6450,2350) R8.1 ; v1(6450,3270) R7.1 ; v1(6450,3615) 6450,3620 6480,3650 R5.1
  Top Layer w31.89: v1(4695,4295) 4755,4295 4779.76,4319.76 C1.2
  Top Layer w32: v1(4695,4295) 4695,4220 4779.76,4135.24 C2.2 ; C3.2 v1(5120,3830) ; v1(6205,4200) 6205,4274.69 6235.16,4304.84 U1.1
NetC1_1: C1.1 D1.2 U1.3 | length 1490.9
  Top Layer w24: D1.2 5460,4339.65 5605.51,4485.16
  Top Layer w24.02: 5605.51,4485.16 U1.3
  Top Layer w31.89: C1.1 5000.24,4380.41 5000.65,4380.83 5000.65,4445.19 5019.33,4463.87 5096.13,4463.87 5220.35,4339.65 D1.2
NetD1_1: D1.1 J1.1 | length 482.6
  Top Layer w31.89: D1.1 5380,4085 5415,4050 5570,4050 5649.09,4129.09 J1.1
NetD2_2: D2.2 R1.1 R2.1 | length 433.3
  Top Layer w10: R2.1@6005.63,3825.63 R2.1
  Top Layer w24: R2.1@6005.63,3825.63 R1.1 ; R2.1 6006.26,3775 6021.26,3760 6190,3760 6205,3775 D2.2
NetD3_1: D3.1 R11.2 | length 130.9
  Top Layer w16: R11.2 D3.1
NetD4_1: D4.1 R12.2 | length 129.3
  Top Layer w16: R12.2 D4.1
RESET: R3.1 SW1.3 SW1.4 X1.1 | length 2661
  Top Layer w10: SW1.4@6476.34,4198.43 SW1.4
  Top Layer w16: X1.1 5345,2590 5370,2615 5370,3185 5895,3710 6255,3710 6476.34,3931.34 R3.1 SW1.4@6476.34,4198.43 ; SW1.4 SW1.3
VCC: C2.1 C3.1 C4.1 FB1.1 J2.1 J3.1 J4.1 J5.1 J6.1 J7.1 J8.1 J9.1 J10.2 J11.2 J12.1 J13.1 J14.1 R1.2 R2.2 R3.2 U1.2 U1.4 X1.7 | length 11531.5
  Top Layer w10: R2.2@6084.37,3825.63 R2.2 ; R3.2 R3.2@6395,4076.34
  Top Layer w24: 4595,1429.37 4625,1399.37 J7.1 ; 4595,1430 4595,1738.74 4635,1778.74 ; J6.1@4667.94,3626.68 4616.68,3626.68 4595,3605 4595,3205.15 4635,3165.15 ; J10.2@4669.85,3165.15 4635,3165.15 ; J11.2 4635,1778.74 ; J9.1 4632.52,2317.48 ; J8.1 4632.48,2782.48 ; J6.1 4670,3745 4755,3830 C3.1 ; C4.1@5120.3,1904.09 5129.06,1912.85 C4.1 ; X1.7 5250,1990 5172.85,1912.85 C4.1 ; FB1.1@5750,1925.43 5750,1990 5900,2140 6790,2140 6824.51,2174.51 6824.51,2235.77 J5.1 6870,2236.26 ; 5940,4170 6084.37,4025.63 R1.2 R2.2@6084.37,3825.63 ; U1.2 6355,4395 6395,4355 R3.2@6395,4076.34 ; R3.2 6393.66,4007.3 v1(6420.96,3980) ; J14.1 6890,1317.52 6910,1337.52 6910,1815 6870,1855 ; J3.1 6870,1855 ; J12.1 6865,2616.26 ; J4.1 6867.52,3156.26 ; J2.1@6825,3536.26 6868.74,3536.26 6887.5,3517.5 ; J13.1 6890,3915 6910,3895 6910,3540 6887.5,3517.5 ; 4595,2020 4595,2279.96 4632.52,2317.48 ; 4595,2020 4595,1818.74 4635,1778.74 ; 4595,2020 4855,2020 5025,1850 5105.89,1850 5135,1879.11 C4.1 ; 4632.52,2317.48 4595,2355 4595,2745 4632.48,2782.48 ; 4632.48,2782.48 4595,2819.96 4595,3125.15 4635,3165.15 ; 6865,2616.26 6910,2571.26 6910,2276.26 6870,2236.26 ; 6865,2616.26 6910,2661.26 6910,3113.78 6867.52,3156.26 ; 6867.52,3156.26 6910,3198.74 6910,3495 6887.5,3517.5 ; 6870,1855 6910,1895 6910,2196.26 6870,2236.26
  Top Layer w32: J7.1@4660.25,1409.12 J7.1 ; J6.1@4667.94,3626.68 J6.1 ; J10.2@4669.85,3165.15 J10.2 ; C3.1 4996.43,3956.43 5025,3985 ; C2.1 5000.75,4069.49 5000.75,4009.25 5025,3985 ; U1.2 U1.4 5995,4395 5940,4340 5940,4170 5755,3985 5025,3985
  GND w24: v1(6420.96,3980) 6525,3980 6590,3915 J13.1
XTAL1: R4.2 X1.9 Y1.1 | length 286.3
  Top Layer w16: Y1.1 5082.76,1787.24 5093.21,1776.79 5130.61,1776.79 R4.2@5132.4,1775 ; R4.2 5195,1777.6 5207.4,1790 X1.9
  Top Layer w24: R4.2@5132.4,1775 R4.2
XTAL2: R4.1 X1.10 Y1.3 | length 284.1
  Top Layer w16: Y1.3 5083.56,1692.76 5093.21,1702.4 R4.1 5195,1702.4 5207.4,1690 X1.10

## Polygon pours and split planes (outlines as drawn)
GND on GND "GND_L02_P004" (solid, pour order 4): 4735,4575 5700,4575 6650.02,4574.98 cw(c6650.02,4473.68) 6750,4490 6750,4475 ccw(c6875,4475) 6875,4350 cw(c6875,4250) 6975,4250 6975,1190 cw(c6889.59,1190) 6945,1125 cw(c6890.71,1188.68) 6890,1105 4610,1105 cw(c4645,1225) 4525,1190 4525,3730 cw(c4567.5,3732.5) 4570,3775 4595,3775 ccw(c4555,3870) 4650,3830 4650,4490 cw(c4777.5,4447.5)

## Keep-outs
Keep-Out Layer:
  lines w10: 5019.69,3069.78 5019.69,3187.89 5039.37,3207.57 5157.48,3207.57 5177.17,3187.89 5177.17,3069.78 5157.48,3050.09 5039.37,3050.09 5019.69,3069.78 ; 6062.99,1633.86 6082.68,1614.17 6200.79,1614.17 6220.47,1633.86 6220.47,1751.97 6200.79,1771.65 6082.68,1771.65 6062.99,1751.97 6062.99,1633.86 ; 6062.99,3390.64 6062.99,3508.75 6082.68,3528.44 6200.79,3528.44 6220.47,3508.75 6220.47,3390.64 6200.79,3370.96 6082.68,3370.96 6062.99,3390.64

## Silkscreen, mask and mechanical layers (free items; w line width, h text height)
Top Overlay:
  circle w10: c5098.43,3128.83 r78.74
  circle w10: c6141.73,3449.7 r78.74
  circle w10: c6141.73,1692.91 r78.74
  lines w10: 6971.35,3449.7 6975.39,3453.74 ; 5805,2365 5915,2365 5915,2795 5805,2795 5805,2365 ; 6130,4035 6280,4035 6280,4135 6130,4135 6130,4035 ; 6295,2465 6295,2795 6405,2795 6405,2465 6295,2465
  text "ON" at 6155,4055 h60
  text "V|M" at 4629.92,3452.76 h50 r270
  text "L|H" at 6820.87,3431.1 h50 r270
  text "P.A.P.A.Y.A" at 5565,3105 h150
  text "L|S" at 6821.85,3047.24 h50 r270
  text "by PulseCode" at 6270,3010 h60
  text "SITTING" at 5830,2770 h60 r270
  text "ALERT" at 6320,2770 h60 r270
  text "Y|N" at 4630.91,2521.65 h50 r270
  text "SIT" at 4692.53,2506.89 h50 r270
  text "R|S" at 6829.72,2130.91 h50 r270
  text "R|H" at 6828.74,1752.95 h50 r270
  text "V|M" at 4629.92,1605.32 h50 r270

## Text inside footprints (layer, text, board x,y; h text height)
C1: Top Overlay "+" at 5080.94,4360.31 h48
C2: Top Overlay "+" at 5080.94,4050.32 h48